# Altium PCB POWER_SUPPLY.PcbDoc (part 1 of 5)
Units mm, origin at the board's own origin, x right, y up, seen from the top; angles counter-clockwise.
Board outline 115 x 115 mm, 2 copper layers (Top Layer, Bottom Layer), stack 1.58 mm thick; 91 components, 48 nets, 207 pads, 26 vias.
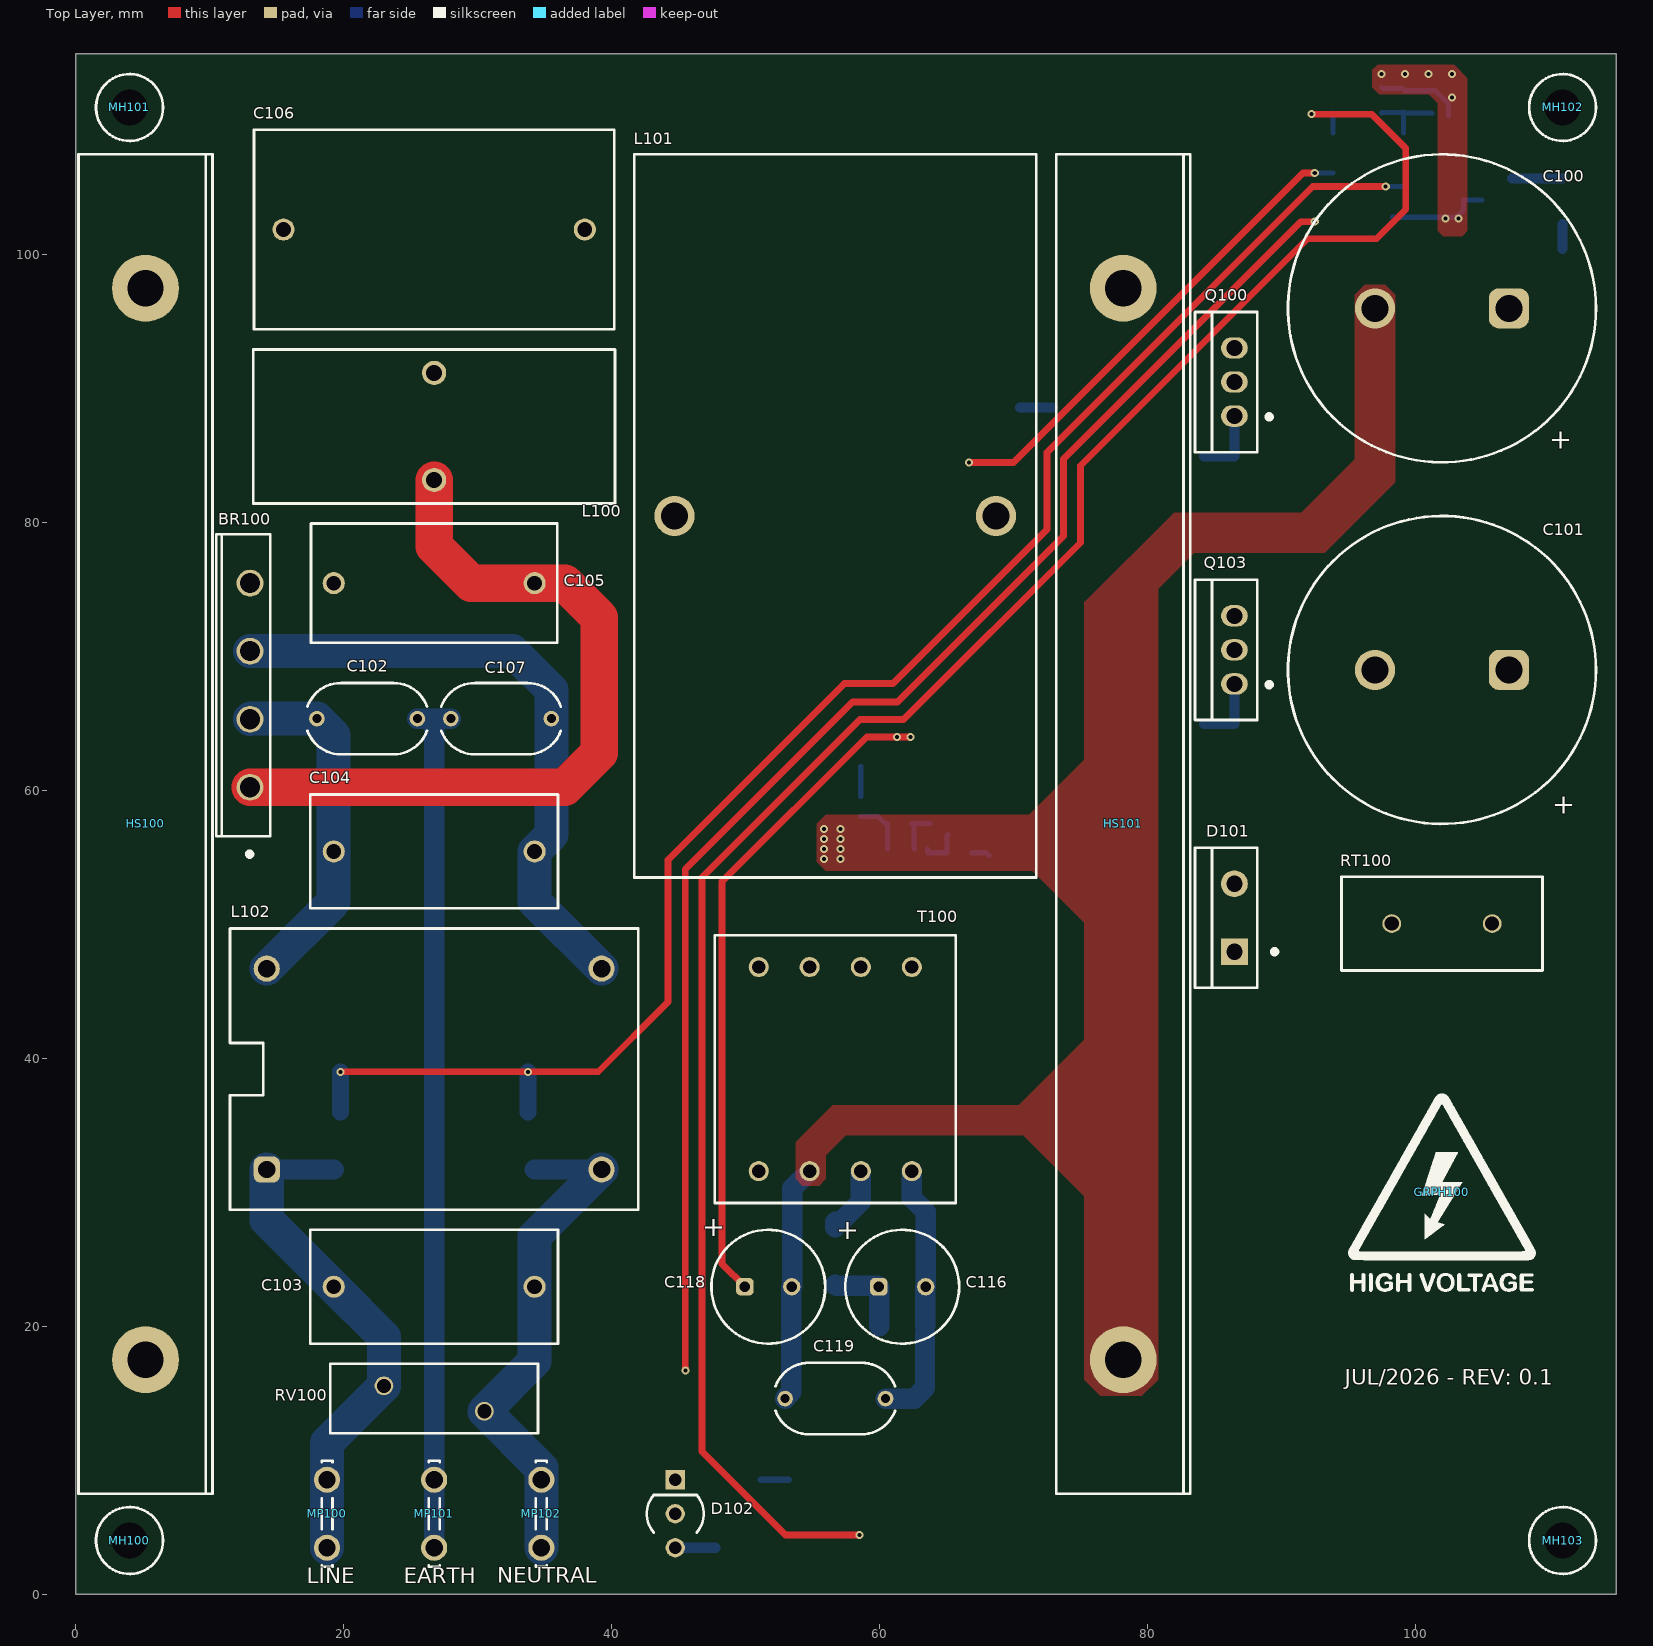
[diagram p0: Top Layer view]
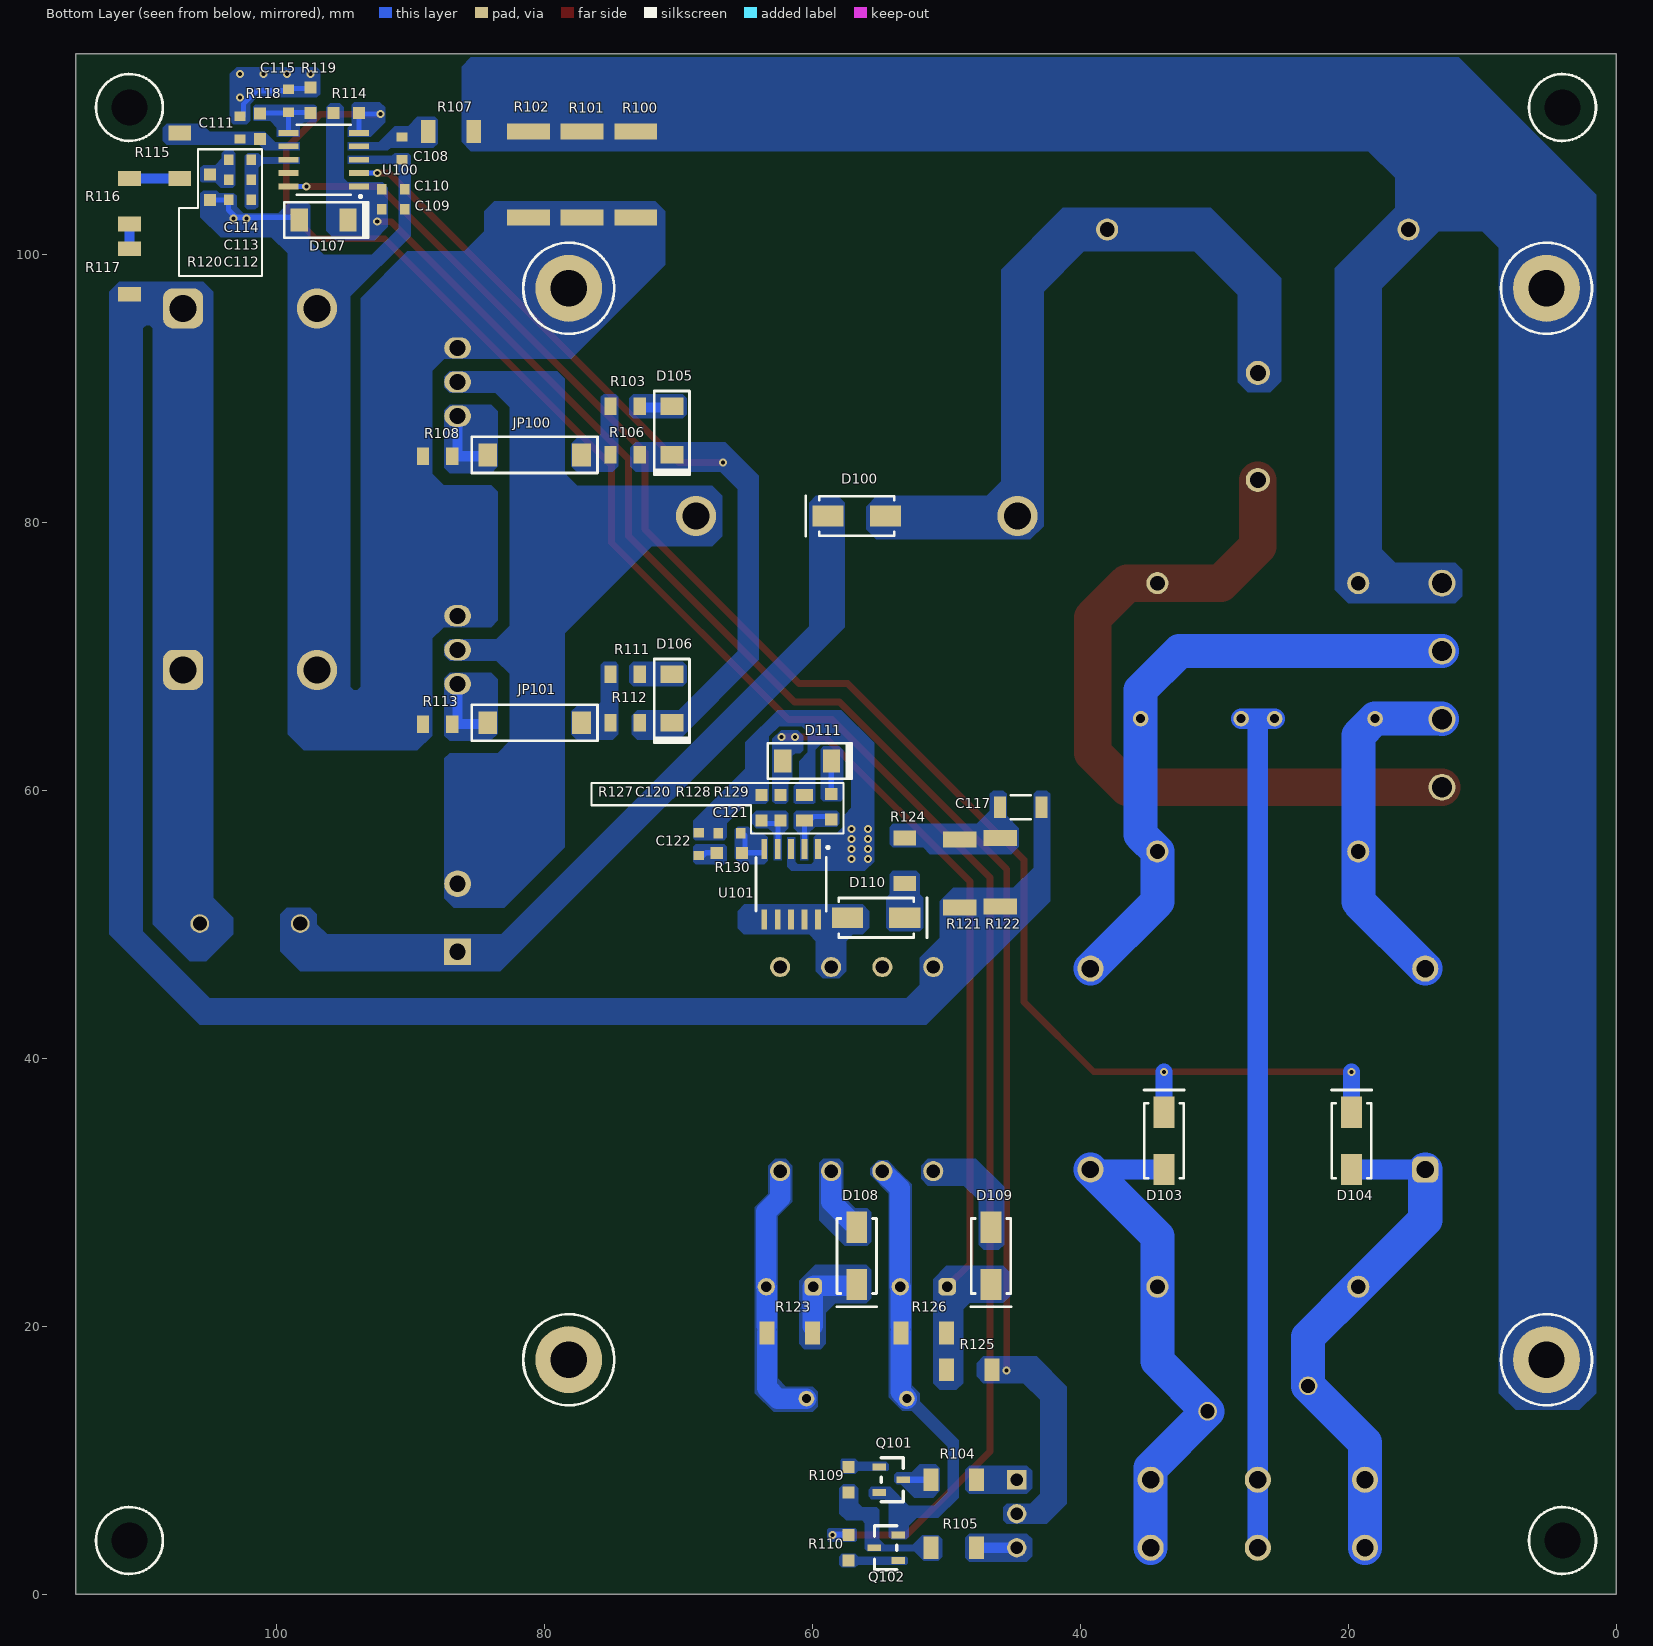
[diagram p1: Bottom Layer view, seen from below]
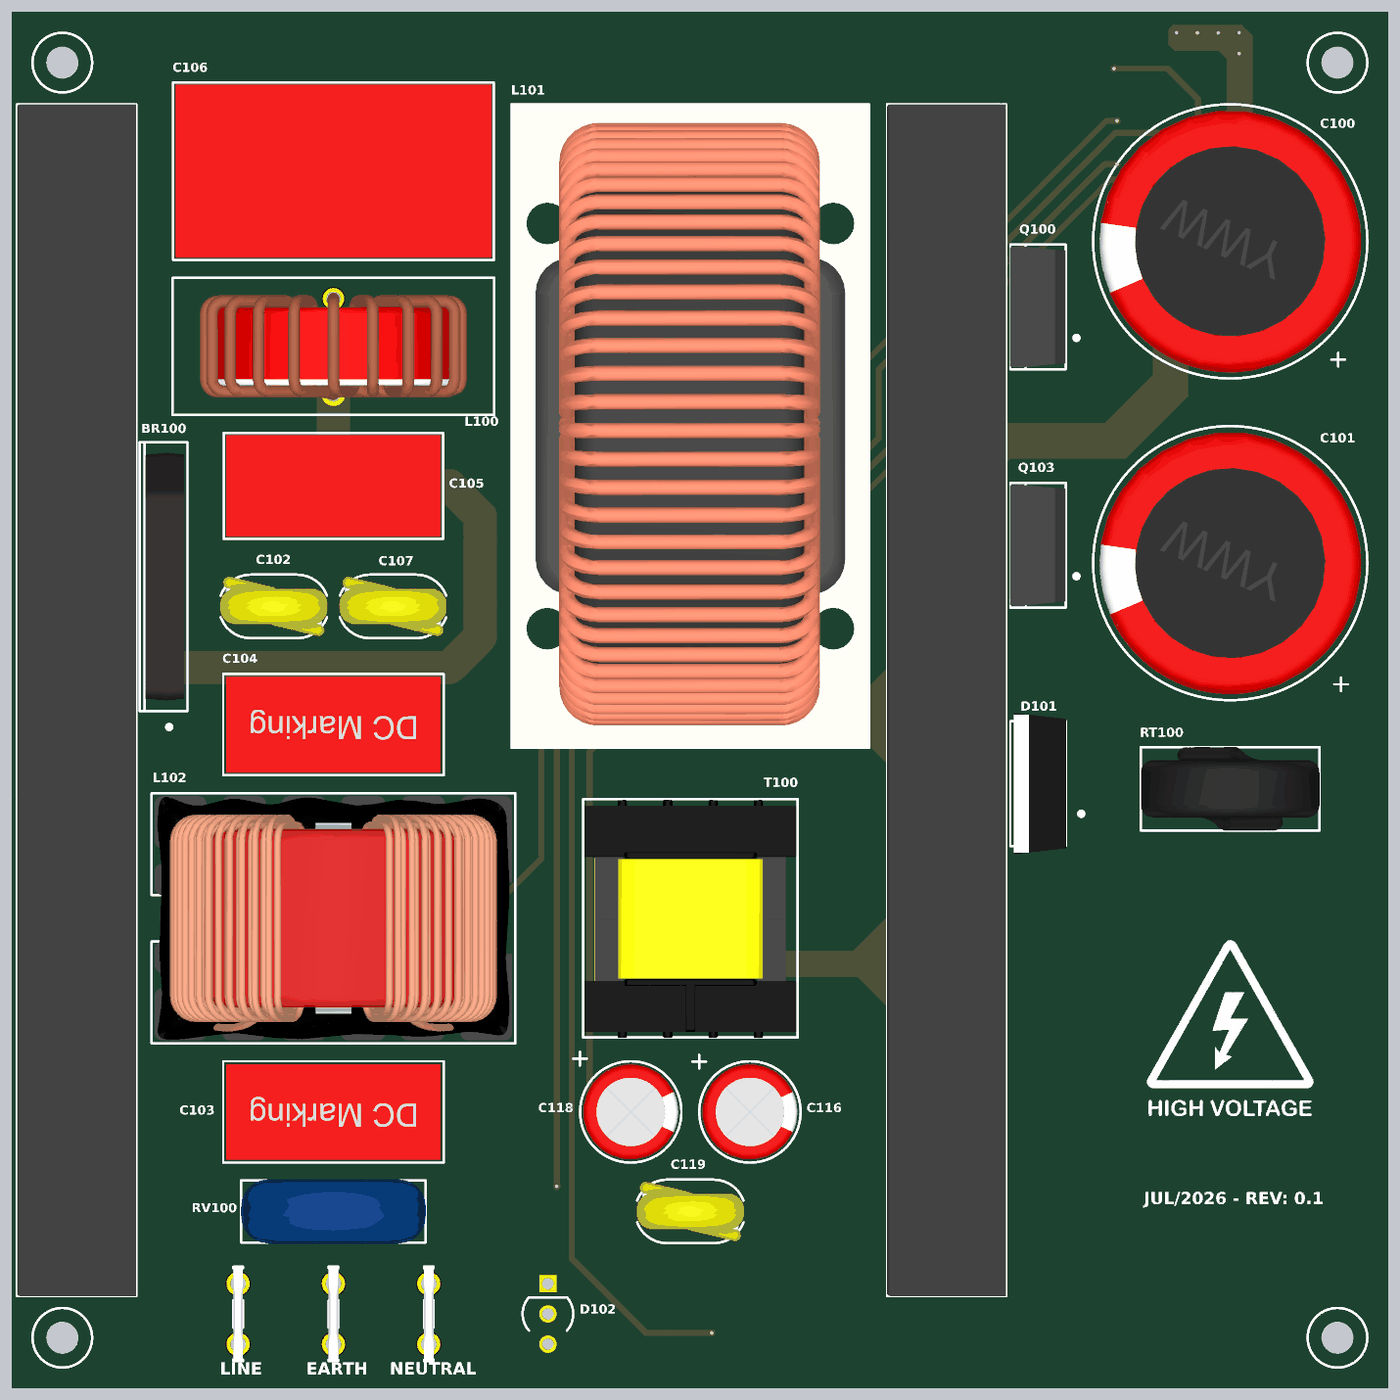
[diagram p3: 3D render of the assembled board from above, using the file's embedded part models]
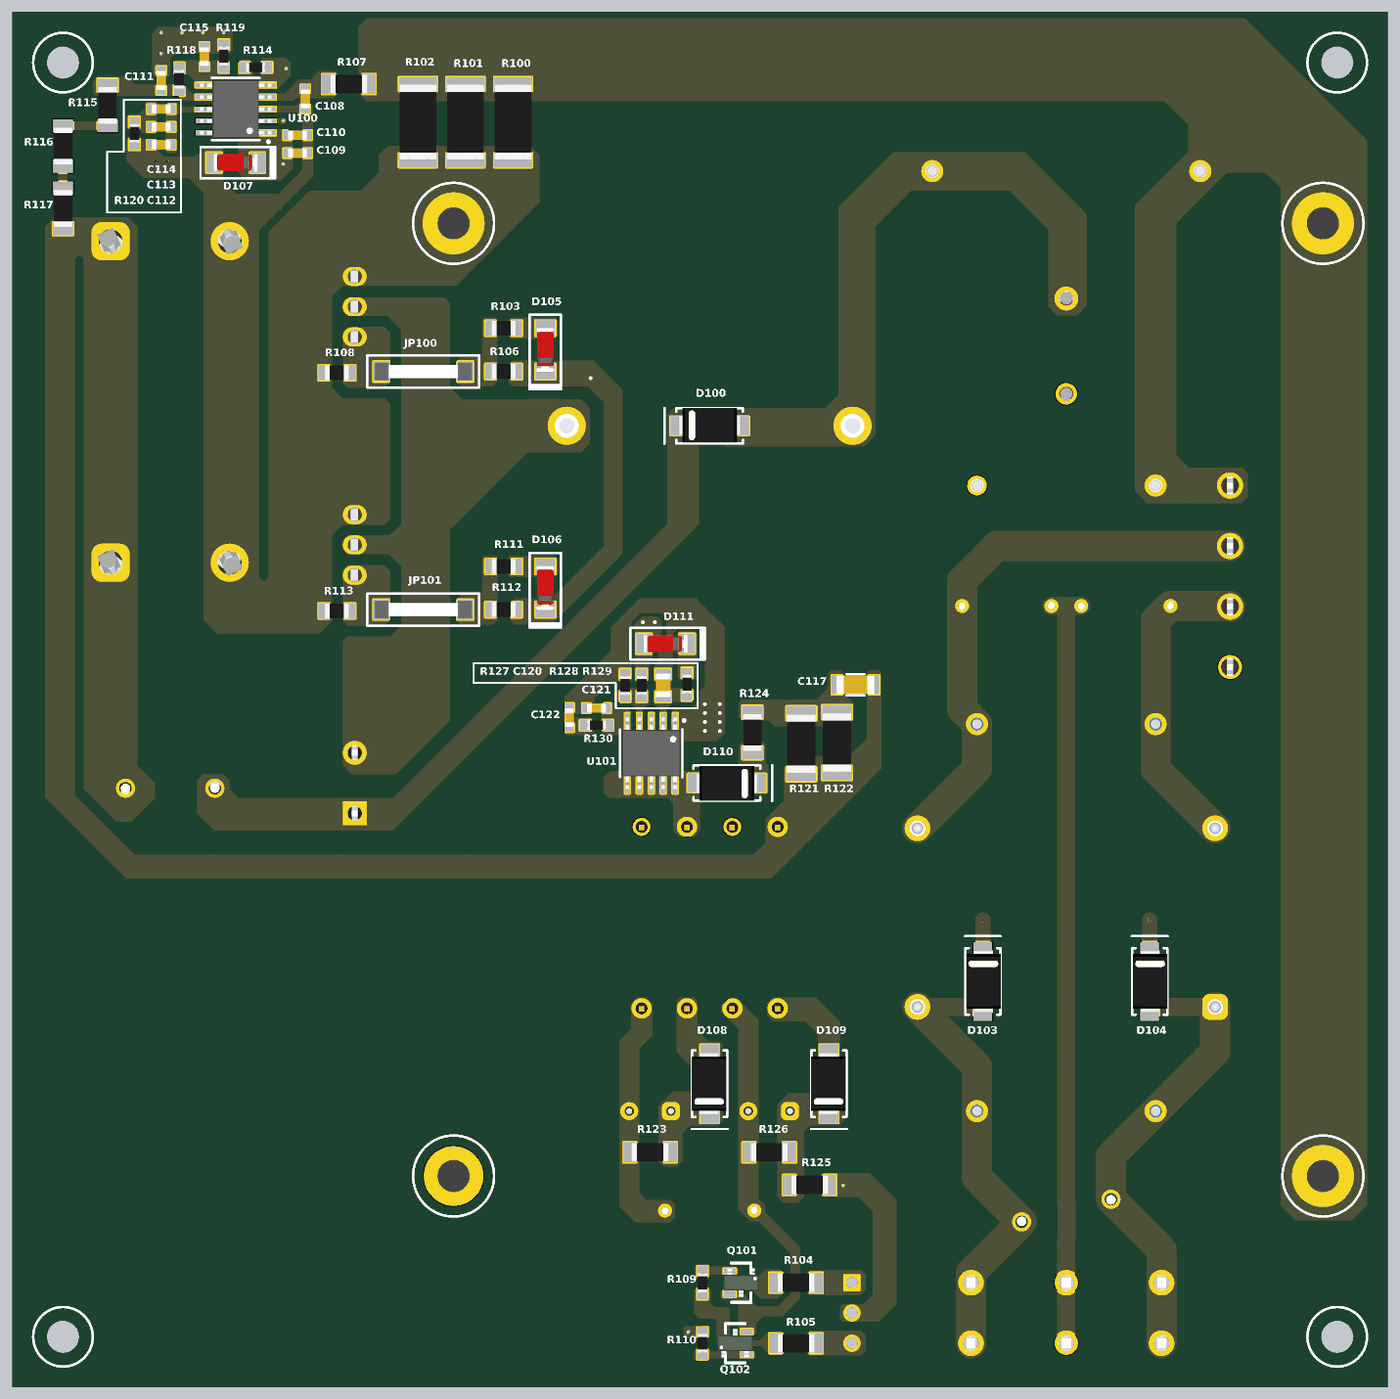
[diagram p4: 3D render of the assembled board from below, using the file's embedded part models]

## Layer stack, top to bottom
Top Solder: solder mask 0.01, Solder Resist, Dk 3.5
Top Layer: signal copper 0.07
Dielectric 1: dielectric 1.44, FR-4, Dk 4.8
Bottom Layer: signal copper 0.07
Bottom Solder: solder mask 0.01, Solder Resist, Dk 3.5

## Board outline
0,0 115,0 115,115 0,115

## Design rules (kind name [scope] priority, off if disabled: settings)
Clearance [All] p1: gap=0.254 ignorepadtopadclearanceinfootprint=FALSE
Height [All] p1: minheight=0 maxheight=65 prefheight=60
HoleSize [All] p1: absolutevalues=TRUE maxlimit=6.3 minlimit=0.15 maxpercent=80.000 minpercent=20.000
PolygonConnect [All] p1: connectstyle=Direct reliefconductorwidth=0.254 reliefentries=4 polygonreliefangle="90 Angle" airgapwidth=0.254
RoutingVias [All] p1: holewidth=0.3 width=0.6 viastyle="Through Hole" minholewidth=0.3 minwidth=0.6 maxholewidth=0.3 maxwidth=0.6
SilkToSolderMaskClearance [IsPad] p1: minsilkscreentomaskgap=0.15 clearancetoexposedcopper=TRUE
SolderMaskExpansion [All] p1: expansion=0.1 istentingtop=FALSE
SupplyNets "Schematic Supply Nets_5" [InNet('+5V_ISO')] p1: voltage=0.000
SupplyNets "Schematic Supply Nets_4" [InNet('+400V_PFC')] p2: voltage=0.000
SupplyNets "Schematic Supply Nets_3" [InNet('GND_ISO')] p3: voltage=0.000
SupplyNets "Schematic Supply Nets_2" [InNet('GND_PFC')] p4: voltage=0.000
SupplyNets "Schematic Supply Nets_1" [InNet('+15V')] p5: voltage=0.000
SupplyNets "Schematic Supply Nets" [InNet('EARTH')] p6: voltage=0.000
Width [All] p1: maxlimit=5.08 minlimit=0.254 preferedwidth=1.016
27 further rules are at their usual default settings.

## Classes and differential pairs
component class 2_FLYBACK_AUXILIAR: C116 C117 C118 C119 C120 C121 C122 D108 D109 D110 D111 MH100 MH101 MH102 MH103 R121 R122 R123 R124 R125 R126 R127 R128 R129 R130 T100 U101
component class 1_PFC: BR100 C100 C101 C102 C103 C104 C105 C106 C107 C108 C109 C110 C111 C112 C113 C114 C115 D100 D101 D102 D103 D104 D105 D106 D107 F1 GRPH100 HS100 HS101 JP100 JP101 L100 L101 L102 MP100 MP101 MP102 Q100 Q101 Q102 Q103 R100 R101 R102 R103 R104 R105 R106 R107 R108 R109 R110 R111 R112 R113 R114 R115 R116 R117 R118 R119 R120 RT100 RV100 U100

## Components (designator, comment, footprint, x,y, rotation, side; value= is the part's Value field where it differs from the comment)
BR100 "GBU6J" GBU 13,67.864 r90 top value=400pF
C100 "150µF, 450V" WCAP-AIG8_D22H50 102,96 r0 top
C101 "150µF, 450V" WCAP-AIG8_D22H50 102,69 r0 top
C102 "2.2nF, 440VAC" CAP_5US63V7_VIS 21.75,65.367 r180 top value=2.2nF
C103 "470nF, 310VAC" WCAP-FTXX_L18W8H14 26.75,22.95 r180 top
C104 "470nF, 310VAC" WCAP-FTXX_L18W8H14 26.75,55.45 r180 top
C105 "220nF, 630VDC" WCAP-FTXH_L18W8.5H14.5 26.75,75.484 r0 top
C106 "1.5µF, 630VDC" WCAP-FTXH_L26.5W14.5H24.5 26.75,101.884 r0 top
C107 "2.2nF, 440VAC" CAP_5US63V7_VIS 31.75,65.367 r180 top value=2.2nF
C108 "100pF, 25V" WCAP-CSGP_0603_L1.6W0.8H0.8_Wave 90.65,107.95 r90 bottom
C109 "1μF, 50V" WCAP-CSGP_0603_L1.6W0.8H0.8_Wave 91.3,103.4 r0 bottom
C110 "100nF, 50V" WCAP-CSGP_0603_L1.6W0.8H0.8_Wave 91.3,104.9 r0 bottom
C111 "3.3nF, 25V" WCAP-CSGP_0603_L1.6W0.8H0.8_Wave 102.75,109.5 r270 bottom
C112 "150pF, 25V" WCAP-CSGP_0603_L1.6W0.8H0.8_Wave 102.75,104.1 r180 bottom
C113 "NM" WCAP-CSGP_0603_L1.6W0.8H0.8_Wave 102.75,105.6 r180 bottom
C114 "2.2nF, 25V" WCAP-CSGP_0603_L1.6W0.8H0.8_Wave 102.75,107.1 r180 bottom
C115 "10pF, 25V" WCAP-CSGP_0603_L1.6W0.8H0.8_Wave 99.125,111.5 r270 bottom
C116 "220µF, 16V" WCAP-ATUL_D8H11.5 61.7,22.95 r180 top locked
C117 "2.2nF, 630V" WCAP-CSMH_1206_H1.6 44.45,58.75 r180 bottom
C118 "150uF, 25V" WCAP-ATLI_D8H11.5 51.7,22.95 r180 top locked
C119 "2.2nF, 440VAC" CAP_5US63V7_VIS 56.7,14.6 r0 top locked value=2.2nF
C120 "4.7μF, 25V" WCAP-CSGP_0805_L2W1.25H1.25 60.6,58.7 r270 bottom
C121 "470pF, 25V" WCAP-CSGP_0603_L1.6W0.8H0.8_Wave 66.2,56.8 r180 bottom
C122 "33nF, 25V" WCAP-CSGP_0603_L1.6W0.8H0.8_Wave 68.5,56 r270 bottom
D100 "STTH2L06A" SMA 56.7,80.5 r180 bottom
D101 "STTH806DTI" TO-220AC 86.5,50.5 r90 top
D102 "BICOLOR RED/GREEN" LED_3MM_GREEN_RED 44.75,6 r270 top locked
D103 "S1M" SMA 33.75,33.84 r270 bottom value=6.6pF
D104 "S1M" SMA 19.75,33.84 r270 bottom value=6.6pF
D105 "LL4148" SOD-80-DIODE 70.5,86.876 r90 bottom
D106 "LL4148" SOD-80-DIODE 70.5,66.876 r90 bottom
D107 "18V, 0.5W" SOD-80-DIODE 96.5,102.6 r0 bottom
D108 "STPS1L40A" SMA 56.7,25.25 r90 bottom
D109 "STPS1150A" SMA 46.675,25.25 r90 bottom
D110 "STTH1L06A" SMA 55.25,50.5 r0 bottom
D111 "LL4148" SOD-80-DIODE 60.4,62.2 r0 bottom
GRPH100 "DANGER HIGH VOLTAGE ICON" DANGER_HIGH_VOLTAGE 102,30 r0 top
HS100 "100x60x10mm" HEATSINK_100MM_60MM_10MM 5.2,57.5 r0 top
HS101 "100x60x10mm" HEATSINK_100MM_60MM_10MM 78.2,57.5 r0 top
JP100 "JUMPER" JUMPER_TX_8P2MM 80.75,85.06 r0 bottom
JP101 "JUMPER" JUMPER_TX_8P2MM 80.75,65.06 r0 bottom
L100 "SHORTED" 7447070 26.75,87.184 r180 top
L101 "570µH, 8.7A" IND-TOR-MMTR014901_NO_MH 56.7,80.5 r90 top value=570µH
L102 "3.3mH" "WE-CMB_Type XL_L30W21H35" 26.75,39.2 r0 top
MH100 "Mounting Hole 2.5mm" MOUNTING_HOLE_M2P5_UNPLATED 4,4 r0 top
MH101 "Mounting Hole 2.5mm" MOUNTING_HOLE_M2P5_UNPLATED 4,111 r0 top locked
MH102 "Mounting Hole 2.5mm" MOUNTING_HOLE_M2P5_UNPLATED 111,111 r0 top
MH103 "Mounting Hole 2.5mm" MOUNTING_HOLE_M2P5_UNPLATED 111,4 r0 top locked
MP100 "7471287" 7471287 18.75,6 r270 top
MP101 "7471287" 7471287 26.75,6 r270 top
MP102 "7471287" 7471287 34.75,6 r270 top
Q100 "STF24N60M2" TO-220FP 86.5,90.5 r90 top
Q101 "SBC817-40LT3G" SOT-23-3 54.05,8.54 r270 bottom
Q102 "SBC817-40LT3G" SOT-23-3 54.55,3.46 r90 bottom
Q103 "STF24N60M2" TO-220FP 86.5,70.5 r90 top
R100 "0.18Ω, 1W" 2512-WAVE 73.2,106 r270 bottom value=180mΩ
R101 "0.18Ω, 1W" 2512-WAVE 77.2,106 r270 bottom value=180mΩ
R102 "0.18Ω, 1W" 2512-WAVE 81.2,106 r270 bottom value=180mΩ
R103 "3.92Ω" 0805-WAVE 74,88.692 r0 bottom
R104 "1.33kΩ" 1206-WAVE 49.45,8.54 r180 bottom
R105 "1.33kΩ" 1206-WAVE 49.45,3.46 r180 bottom
R106 "15Ω" 0805-WAVE 74,85.06 r0 bottom
R107 "59Ω" 1206-WAVE 87,109.2 r180 bottom
R108 "10kΩ" 0805-WAVE 88,84.96 r180 bottom
R109 "17.8kΩ" 0603-WAVE 57.3,8.54 r270 bottom
R110 "17.8kΩ" 0603-WAVE 57.3,3.46 r90 bottom
R111 "3.92Ω" 0805-WAVE 74,68.692 r0 bottom
R112 "15Ω" 0805-WAVE 74,65.06 r0 bottom
R113 "10kΩ" 0805-WAVE 88,64.96 r180 bottom
R114 "332kΩ" 0603-WAVE 94.825,110.6 r0 bottom
R115 "2.21MΩ" 1206-WAVE 107.25,107.4 r90 bottom
R116 "2.21MΩ" 1206-WAVE 111,104 r90 bottom
R117 "2.21MΩ" 1206-WAVE 111,98.75 r90 bottom
R118 "15.4kΩ" 0603-WAVE 101.25,109.6 r270 bottom
R119 "26.1kΩ" 0603-WAVE 97.5,111.55 r270 bottom
R120 "56.2kΩ" 0603-WAVE 105,105.05 r90 bottom
R121 "150kΩ" 2010-WAVE 49,53.8 r270 bottom
R122 "NM" 2010-WAVE 46,53.9 r270 bottom
R123 "511Ω" 1206-WAVE 61.7,19.5 r180 bottom
R124 "47Ω" 1206-WAVE 53.11,54.75 r90 bottom
R125 "0Ω" 1206-WAVE 48.3,16.75 r180 bottom
R126 "1.5kΩ" 1206-WAVE 51.7,19.5 r180 bottom
R127 "10Ω" 0603-WAVE 58.6,58.8 r90 bottom
R128 "301kΩ" 0603-WAVE 62.4,58.7 r90 bottom
R129 "26.1kΩ" 0603-WAVE 63.8,58.7 r270 bottom
R130 "56.2kΩ" 0603-WAVE 66.2,55.35 r180 bottom
RT100 "1Ω, 9A" B57237S0109M054 102,50.066 r0 top value=1Ω
RV100 "300VAC" MOV-B72214S0301K101 26.75,14.6 r0 top value=400pF
T100 "TRANSFORMADOR CUSTOMIZADO" TDK_E_16_8_5 56.7,39.2 r270 top
U100 "L4986A" SSOP-10 96.5,107.1 r0 bottom
U101 "VIPER222LSTR" SSOP-10 61.6,53 r270 bottom

## Footprints (in the part's own frame and the unit in brackets; to place one, negate y for a bottom-side part, rotate by r counter-clockwise, add the part's x,y. Pads: shape width x height; smd on the part's side, far side on the other; paste and mask are expansions set on the pad)
0603-WAVE [mm]
  rect 0.9x0.9 smd: 1(-0.95,0) 2(0.95,0)
  body extent -0.8,-0.4 0.8,0.4, height 0.45
0805-WAVE [mm]
  rect 0.9x1.3 smd: 1(-1.1,0) 2(1.1,0)
  body extent -1,-0.63 1,0.62, height 0.5
1206-WAVE [mm]
  rect 1.1x1.7 smd: 1(-1.7,0) 2(1.7,0)
  body extent -1.55,-0.77 1.55,0.78, height 0.55
2010-WAVE [mm]
  rect 1.2x2.5 smd: 1(-2.55,0) 2(2.55,0)
  body extent -2.45,-1.2 2.45,1.2, height 0.55
2512-WAVE [mm]
  rect 1.2x3.2 smd: 1(-3.2,0) 2(3.2,0)
  body extent -3.15,-1.55 3.15,1.55, height 0.55
7447070 [mm] "Leaded Toroidal Line Choke, 2-leads, body 25x11.5mm"
  round 1.8 hole 1.2: 1(0,4) 2(0,-4)
  silkscreen extent -13.5,-5.75 13.5,5.75, body extent -11.21,-4.5 11.21,4.5, height 22.01
7471287 [mm] "Mounting Tabs & Tubular Cable Lugs"
  round 1.95 hole 1.3: 1(-2.54,0) 1(2.54,0)
  silkscreen extent -3.96,-0.41 3.96,0.41, body extent -3.96,-0.4 3.96,0.41, height 10.27
B57237S0109M054 [mm]
  round 1.4 hole 1.05: 1(-3.75,0) 2(3.75,0)
  silkscreen extent -7.5,-3.5 7.5,3.5, body extent -7.5,-3.5 7.5,3.5, height 22
CAP_5US63V7_VIS [mil]
  round 46 hole 26 paste-99999 mask+0: 1(-147.64,0) 2(147.64,0)
  silkscreen extent -176,-105 176,105, body extent -177,-98 177,98, height 472
DANGER_HIGH_VOLTAGE [mm]
  silkscreen extent -6.99,-7.41 6.99,7.36
GBU [mm]
  round 2 hole 1.5 paste-2539.97 mask+0.1: 1(-7.62,0) 2(-2.54,0) 3(2.54,0) 4(7.62,0)
  silkscreen extent -12.71,-1.5 11.28,2.52, body extent -10.4,-1.25 10.4,2.05, height 29.52
HEATSINK_100MM_60MM_10MM [mm]
  round 5 hole 2.7: H1(0,40) H2(0,-40)
  silkscreen extent -5,-50 5,50, body extent -5,-50 5,50, height 60
IND-TOR-MMTR014901_NO_MH [mm]
  round 3 hole 2: 1(0,12) 2(0,-12)
  silkscreen extent -27,-15 27,15, body extent -27,-15 27,15, height 52.18
JUMPER_TX_8P2MM [mm]
  rect 1.4x1.7 smd mask+0.1: 1(-3.5,0) 2(3.5,0)
  silkscreen extent -4.7,-1.35 4.7,1.35, body extent -4.1,-0.75 4.1,0.75, height 0.6
LED_3MM_GREEN_RED [mm]
  rect 1.45x1.45 hole 0.95 paste-2539.97 mask+0: 1(-2.54,0)
  round 1.45 hole 0.95 paste-2539.97 mask+0: 2(0,0) 3(2.54,0)
  silkscreen extent -1.4,-2.12 1.4,2.12, body extent -2.79,-2 2.79,2, height 6.53
MOUNTING_HOLE_M2P5_UNPLATED [mm]
  round 2.5 hole 2.7 unplated: H(0,0)
  silkscreen extent -2.5,-2.5 2.5,2.5
MOV-B72214S0301K101 [mm]
  round 1.4 hole 1.05: 1(-3.75,0.95) 2(3.75,-0.95)
  silkscreen extent -7.75,-2.6 7.75,2.6, body extent -7.75,-2.7 7.75,2.7, height 20.73
SMA [mm]
  rect 2.33x1.56 smd paste+0 mask+0.1: 1(-2.14,0)
  rect 2.33x1.56 smd paste+0 mask+0.102: 2(2.14,0)
  silkscreen extent -3.8,-1.5 2.8,1.5, body extent -2.64,-1.42 2.64,1.5, height 2.41
SOD-80-DIODE [mil]
  rect 51x67 smd paste+0 mask+3.94: 1(-71.5,0) 2(71.5,0)
  silkscreen extent -130,-52 116,52, body extent -73,-31 73,31, height 62
SOT-23-3 [mil]
  rect 20x40 smd mask+3.94: 1(-37.4,-38) 2(37.4,-38) 3(0,32.75)
  silkscreen extent -65,-33 65,33, body extent -57,-47 57,47, height 44
SSOP-10 [mm]
  rect 1.5x0.432 smd: 1(-2.625,2) 2(-2.625,1) 3(-2.625,0) 4(-2.625,-1) 5(-2.625,-2) 6(2.625,-2) 7(2.625,-1) 8(2.625,0) 9(2.625,1) 10(2.625,2)
  silkscreen extent -2.85,-2.61 2,2.85, body extent -3,-2.45 3,2.45, height 1.55
TDK_E_16_8_5 [mm]
  round 1.5 hole 1: 1(-7.62,5.715) 2(-7.62,1.905) 3(-7.62,-1.913) 4(-7.62,-5.715) 5(7.62,-5.715) 6(7.62,-1.913) 7(7.62,1.905) 8(7.62,5.715)
  silkscreen extent -10,-9 10,9, body extent -9.95,-8.9 10.05,8.9, height 14.11
TO-220AC [mm]
  rect 2x2 hole 1.2 paste-2539.97 mask+0: 1(-2.538,0)
  round 2 hole 1.2 paste-2539.97 mask+0: 2(2.538,0)
  silkscreen extent -5.23,-3.1 5.23,2.95, body extent -5.94,-1.75 5.94,2.65, height 22.51
TO-220FP [mm]
  oval 1.6x2 hole 1.2 paste-2539.97 mask+0: 1(-2.54,0) 2(0,0) 3(2.54,0)
  silkscreen extent -5.23,-2.7 5.23,2.95, body extent -5.08,-1.69 5.08,3.01, height 22.29
WCAP-AIG8_D22H50 [mm] "Aluminium Electrolytic Snap-In Capacitors, 22x50mm"
  rrect50% 3x3 hole 2: 1(5,0)
  round 3 hole 2: 2(-5,0)
  silkscreen extent -11.5,-11.5 11.5,11.5, body extent -15.55,-15.55 15.54,15.54, height 50.19
WCAP-ATLI_D8H11.5 [mm] "Aluminum Electrolytic Capacitors, 8x11.5mm"
  rrect50% 1.3x1.3 hole 0.8: 1(1.75,0)
  round 1.3 hole 0.8: 2(-1.75,0)
  silkscreen extent -4.25,-4.25 4.25,4.25, body extent -3.99,-4 4,4, height 11.81
WCAP-ATUL_D8H11.5 [mm] "Aluminum Electrolytic Capacitors, 8x11.5mm"
  rrect50% 1.3x1.3 hole 0.8: 1(1.75,0)
  round 1.3 hole 0.8: 2(-1.75,0)
  silkscreen extent -4.25,-4.25 4.25,4.25, body extent -3.99,-4 4,4, height 11.81
WCAP-CSGP_0603_L1.6W0.8H0.8_Wave [mm] "Ceramic Capacitors, 0603, body 1.6x0.8mm"
  rect 0.7x0.8 smd: 1(-0.85,0) 2(0.85,0)
  body extent -0.8,-0.4 0.8,0.4, height 0.8
WCAP-CSGP_0805_L2W1.25H1.25 [mm] "Ceramic Capacitors, body 2x1.25mm"
  rect 0.9x1.3 smd: 1(-0.95,0) 2(0.95,0)
  body extent -1,-0.63 1,0.63, height 1.25
WCAP-CSMH_1206_H1.6 [mm] "Ceramic Capacitors, body 3.2x1.6mm"
  rect 0.9x1.6 smd: 1(-1.55,0) 2(1.55,0)
  silkscreen extent -0.75,-0.9 0.75,0.9, body extent -1.6,-0.8 1.6,0.8, height 1.6
WCAP-FTXH_L18W8.5H14.5 [mm] "Film Capacitor, body 18.00x8.50mm"
  round 1.65 hole 1.1: 1(-7.5,0) 2(7.5,0)
  silkscreen extent -9.2,-4.45 9.2,4.45, body extent -9,-4.25 9,4.25, height 14.5
WCAP-FTXH_L26.5W14.5H24.5 [mm] "Film Capacitor, body 26.50x14.50mm"
  round 1.65 hole 1.1: 1(-11.25,0) 2(11.25,0)
  silkscreen extent -13.45,-7.45 13.45,7.45, body extent -13.25,-7.25 13.25,7.25, height 24.35
WCAP-FTXX_L18W8H14 [mm] "Film Capacitors, 18x8x14mm"
  round 1.65 hole 1.1: 1(-7.5,0) 2(7.5,0)
  silkscreen extent -9.25,-4.25 9.25,4.25, body extent -9,-4 9,4, height 14.05
"WE-CMB_Type XL_L30W21H35" [mm] "Common Mode Power Line Choke, 4-Leads, body 30x21mm"
  rrect50% 1.95x1.95 hole 1.3: 1(-12.5,-7.5)
  round 1.95 hole 1.3: 2(12.5,-7.5) 3(12.5,7.5) 4(-12.5,7.5)
  silkscreen extent -15.25,-10.5 15.25,10.5, body extent -15,-10.25 15,10.25, height 34.19

## Part data
BR100: "BRIDGE RECT 1PHASE 600V 6A GBU", Average Rectified Current=6A, Case/Package=SIP, Forward Voltage=1V, Manufacturer=onsemi, Manufacturer Lifecycle Status=ACTIVE, Max Forward Surge Current (Ifsm)=175A, Max Junction Temperature (Tj)=150°C, Max Power Dissipation=12W, Max Repetitive Reverse Voltage (Vrrm)=600V, Max Reverse Leakage Current=5µA, Min Operating Temperature=-55°C, Supplier Part Number=GBU6JFS-ND, Category="Bridge Rectifier Diodes", China RoHS=Non-Compliant, ComponentLink1Description=https://datasheet.octopart.com:443/GBU6J-onsemi-datasheet-166784474.pdf?src-supplier=Upverter, ComponentLink1URL=https://datasheet.octopart.com:443/GBU6J-onsemi-datasheet-166784474.pdf?src-supplier=Upverter, ComponentLink2Description=https://sigma.octopart.com:443/159494665/technical_drawing/onsemi-GBU6J.pdf?src-supplier=Upverter, ComponentLink2URL=https://sigma.octopart.com:443/159494665/technical_drawing/onsemi-GBU6J.pdf?src-supplier=Upverter, ComponentLink3Description=https://datasheet.octopart.com:443/GBU6J-ON-Semiconductor-datasheet-21133206.pdf?src-supplier=IHS, ComponentLink3URL=https://datasheet.octopart.com:443/GBU6J-ON-Semiconductor-datasheet-21133206.pdf?src-supplier=IHS, ComponentLink4Description=https://datasheet.octopart.com:443/GBU6J-onsemi-datasheet-180960912.pdf?src-supplier=IHS, ComponentLink4URL=https://datasheet.octopart.com:443/GBU6J-onsemi-datasheet-180960912.pdf?src-supplier=IHS, ComponentLink5Description=https://datasheet.octopart.com:443/GBU6J-ON-Semiconductor-datasheet-133511150.pdf?src-supplier=Master+Electronics, ComponentLink5URL=https://datasheet.octopart.com:443/GBU6J-ON-Semiconductor-datasheet-133511150.pdf?src-supplier=Master+Electronics, ComponentLink6Description=https://datasheet.octopart.com:443/GBU6J-ON-Semiconductor-datasheet-81100643.pdf?src-supplier=onsemi, ComponentLink6URL=https://datasheet.octopart.com:443/GBU6J-ON-Semiconductor-datasheet-81100643.pdf?src-supplier=onsemi, ComponentLink7Description=https://datasheet.octopart.com:443/GBU6J-ON-Semiconductor-datasheet-86697259.pdf?src-supplier=onsemi, ComponentLink7URL=https://datasheet.octopart.com:443/GBU6J-ON-Semiconductor-datasheet-86697259.pdf?src-supplier=onsemi, ComponentLink8Description=https://datasheet.octopart.com:443/GBU6J-Fairchild-datasheet-126805.pdf?src-supplier=Fairchild+Semiconductor, ComponentLink8URL=https://datasheet.octopart.com:443/GBU6J-Fairchild-datasheet-126805.pdf?src-supplier=Fairchild+Semiconductor, ComponentLink9Description=https://sigma.octopart.com:443/17352143/technical_drawing/Fairchild-Semiconductor-GBU6J.pdf?src-supplier=Fairchild+Semiconductor, ComponentLink9URL=https://sigma.octopart.com:443/17352143/technical_drawing/Fairchild-Semiconductor-GBU6J.pdf?src-supplier=Fairchild+Semiconductor, ComponentLink10Description=https://datasheet.octopart.com:443/GBU6J-Fairchild-Semiconductor-datasheet-12533422.pdf?src-supplier=Newark, ComponentLink10URL=https://datasheet.octopart.com:443/GBU6J-Fairchild-Semiconductor-datasheet-12533422.pdf?src-supplier=Newark, ComponentLink11Description=https://datasheet.octopart.com:443/GBU6J-onsemi-datasheet-181958985.pdf?src-supplier=Newark, ComponentLink11URL=https://datasheet.octopart.com:443/GBU6J-onsemi-datasheet-181958985.pdf?src-supplier=Newark, ComponentLink12Description=https://datasheet.octopart.com:443/GBU6J-Fairchild-datasheet-21080.pdf?src-supplier=Newark, ComponentLink12URL=https://datasheet.octopart.com:443/GBU6J-Fairchild-datasheet-21080.pdf?src-supplier=Newark, ComponentLink13Description=https://datasheet.octopart.com:443/GBU6J-Fairchild-Semiconductor-datasheet-67910529.pdf?src-supplier=Newark, ComponentLink13URL=https://datasheet.octopart.com:443/GBU6J-Fairchild-Semiconductor-datasheet-67910529.pdf?src-supplier=Newark, ComponentLink14Description=https://datasheet.octopart.com:443/GBU6J-ON-Semiconductor-datasheet-86690898.pdf?src-supplier=Farnell, ComponentLink14URL=https://datasheet.octopart.com:443/GBU6J-ON-Semiconductor-datasheet-86690898.pdf?src-supplier=Farnell, ComponentLink15Description=https://datasheet.octopart.com:443/GBU6J-Fairchild-Semiconductor-datasheet-17852642.pdf?src-supplier=Farnell, ComponentLink15URL=https://datasheet.octopart.com:443/GBU6J-Fairchild-Semiconductor-datasheet-17852642.pdf?src-supplier=Farnell, ComponentLink16Description=https://datasheet.octopart.com:443/GBU6J-Fairchild-Semiconductor-datasheet-16807792.pdf?src-supplier=Farnell, ComponentLink16URL=https://datasheet.octopart.com:443/GBU6J-Fairchild-Semiconductor-datasheet-16807792.pdf?src-supplier=Farnell, ComponentLink17Description=https://datasheet.octopart.com:443/GBU6J-onsemi-datasheet-165581311.pdf?src-supplier=TME, ComponentLink17URL=https://datasheet.octopart.com:443/GBU6J-onsemi-datasheet-165581311.pdf?src-supplier=TME, ComponentLink18Description=https://datasheet.octopart.com:443/GBU6J-ON-Semiconductor-datasheet-140794306.pdf?src-supplier=Future+Electronics, ComponentLink18URL=https://datasheet.octopart.com:443/GBU6J-ON-Semiconductor-datasheet-140794306.pdf?src-supplier=Future+Electronics, ComponentLink19Description=https://datasheet.octopart.com:443/GBU6J-Fairchild-Semiconductor-datasheet-14038890.pdf?src-supplier=iiiC, ComponentLink19URL=https://datasheet.octopart.com:443/GBU6J-Fairchild-Semiconductor-datasheet-14038890.pdf?src-supplier=iiiC, ComponentLink20Description=https://datasheet.octopart.com:443/GBU6J-Fairchild-Semiconductor-datasheet-68551039.pdf?src-supplier=element14+APAC, ComponentLink20URL=https://datasheet.octopart.com:443/GBU6J-Fairchild-Semiconductor-datasheet-68551039.pdf?src-supplier=element14+APAC, ComponentLink21Description=https://datasheet.octopart.com:443/GBU6J-Fairchild-Semiconductor-datasheet-68612053.pdf?src-supplier=element14+APAC, ComponentLink21URL=https://datasheet.octopart.com:443/GBU6J-Fairchild-Semiconductor-datasheet-68612053.pdf?src-supplier=element14+APAC, ComponentLink22Description=https://datasheet.octopart.com:443/GBU6J-Fairchild-Semiconductor-datasheet-78863373.pdf?src-supplier=element14+APAC, ComponentLink22URL=https://datasheet.octopart.com:443/GBU6J-Fairchild-Semiconductor-datasheet-78863373.pdf?src-supplier=element14+APAC, ComponentLink23Description=http://sigma.octopart.com:80/150611767/rohs_statement/ON-Semiconductor-GBU6J.pdf?src-supplier=Compliance+Statements, ComponentLink23URL=http://sigma.octopart.com:80/150611767/rohs_statement/ON-Semiconductor-GBU6J.pdf?src-supplier=Compliance+Statements, ComponentLink24Description=http://sigma.octopart.com:80/17352174/reach_statement/Fairchild-Semiconductor-GBU6J.pdf?src-supplier=Compliance+Statements, ComponentLink24URL=http://sigma.octopart.com:80/17352174/reach_statement/Fairchild-Semiconductor-GBU6J.pdf?src-supplier=Compliance+Statements, ComponentLink25Description=http://sigma.octopart.com:80/17352175/materials_sheet/Fairchild-Semiconductor-GBU6J.pdf?src-supplier=Compliance+Statements, ComponentLink25URL=http://sigma.octopart.com:80/17352175/materials_sheet/Fairchild-Semiconductor-GBU6J.pdf?src-supplier=Compliance+Statements, ComponentLink26Description=http://sigma.octopart.com:80/33179563/reach_statement/Fairchild-Semiconductor-GBU6J.pdf?src-supplier=Compliance+Statements, ComponentLink26URL=http://sigma.octopart.com:80/33179563/reach_statement/Fairchild-Semiconductor-GBU6J.pdf?src-supplier=Compliance+Statements, ComponentLink27Description=http://sigma.octopart.com:80/33179564/materials_sheet/Fairchild-Semiconductor-GBU6J.pdf?src-supplier=Compliance+Statements, ComponentLink27URL=http://sigma.octopart.com:80/33179564/materials_sheet/Fairchild-Semiconductor-GBU6J.pdf?src-supplier=Compliance+Statements, ComponentLink28Description=http://sigma.octopart.com:80/reach_statement/ON-Semiconductor-company-79.pdf?src-supplier=Compliance+Statements, ComponentLink28URL=http://sigma.octopart.com:80/reach_statement/ON-Semiconductor-company-79.pdf?src-supplier=Compliance+Statements, ComponentLink29Description=http://sigma.octopart.com:80/rohs_statement/Fairchild-Semiconductor-company-11.pdf?src-supplier=Compliance+Statements, ComponentLink29URL=http://sigma.octopart.com:80/rohs_statement/Fairchild-Semiconductor-company-11.pdf?src-supplier=Compliance+Statements, ComponentLink30Description=http://sigma.octopart.com:80/rohs_statement/Fairchild-Semiconductor-company-10.pdf?src-supplier=Compliance+Statements, ComponentLink30URL=http://sigma.octopart.com:80/rohs_statement/Fairchild-Semiconductor-company-10.pdf?src-supplier=Compliance+Statements, ComponentLink31Description=http://sigma.octopart.com:80/reach_statement/Fairchild-Semiconductor-company-9.pdf?src-supplier=Compliance+Statements, ComponentLink31URL=http://sigma.octopart.com:80/reach_statement/Fairchild-Semiconductor-company-9.pdf?src-supplier=Compliance+Statements, ComponentLink32Description=https://octopart.com:443/opatz8j6/c1?t=Y2wIxELd3Wvq9IWEVKKTsbdrjJ7Ggdcm4i7JSptPPw2OaGcdNAyHNaP5bgDn4HJSA5mnN8_a5kzX1s712JK3R8stqVIhLyJyItma3TYm28DTKvbjFTnp9bYk8A4AIXKJFpEh79XU9GUBxzcHZjptp9FPQWLpaKOSykZ5o1DVQXF0q0gaE6lgzVboydEWVrcN4tBadYht0FIpjxhPRkvcWqPgXENNVtgZuGQUgEPqcjuw72yI6g81z1w_15eUU2XXELnp3BdylIv2_9Km_Qs0osbZzRO3K02k_zQ3u8EGf4sSmYaHqZ_JhNL-pzDAUAmjd_hCwscb2tsZsK7vxo9hC2CTL1CcZYwx3w&src-supplier=Compliance+Statements, ComponentLink32URL=https://octopart.com:443/opatz8j6/c1?t=Y2wIxELd3Wvq9IWEVKKTsbdrjJ7Ggdcm4i7JSptPPw2OaGcdNAyHNaP5bgDn4HJSA5mnN8_a5kzX1s712JK3R8stqVIhLyJyItma3TYm28DTKvbjFTnp9bYk8A4AIXKJFpEh79XU9GUBxzcHZjptp9FPQWLpaKOSykZ5o1DVQXF0q0gaE6lgzVboydEWVrcN4tBadYht0FIpjxhPRkvcWqPgXENNVtgZuGQUgEPqcjuw72yI6g81z1w_15eUU2XXELnp3BdylIv2_9Km_Qs0osbZzRO3K02k_zQ3u8EGf4sSmYaHqZ_JhNL-pzDAUAmjd_hCwscb2tsZsK7vxo9hC2CTL1CcZYwx3w&src-supplier=Compliance+Statements, ComponentLink33Description=https://octopart.com:443/opatz8j6/c1?t=uBn0TeqP8mKnL0vu0TJMmksDArhA2xnjYHGUamFnwr0Lj9eHIe45ESEN0N09SN0W_BFgT4nWPUjYGWobgYUvNDrBCDNj55iUPKXM9JYlIPnVrBwaj6wnkAkpfDxE12ONBvxAFGcpA2XbXe3Nb2f-XI-nfFiswF2m2FowNrpNRvB6AKeZWoD9ll47nWlvgbebJo7YeJhCYeCrDHTRzSO7UGKpEOZsMMrM7qA5P6RiotoGMUrQrPOY8nKuTkPUKGEWd7UCPS9eXcAoSRVseLv4YBSMU9ZNnucNIvXCnlBboY69LxYHHH7v03oG_pEBnIu6Uvski6XAlJ3wmAIBVDV8r6g4l_d5L4-3&src-supplier=Compliance+Statements, ComponentLink33URL=https://octopart.com:443/opatz8j6/c1?t=uBn0TeqP8mKnL0vu0TJMmksDArhA2xnjYHGUamFnwr0Lj9eHIe45ESEN0N09SN0W_BFgT4nWPUjYGWobgYUvNDrBCDNj55iUPKXM9JYlIPnVrBwaj6wnkAkpfDxE12ONBvxAFGcpA2XbXe3Nb2f-XI-nfFiswF2m2FowNrpNRvB6AKeZWoD9ll47nWlvgbebJo7YeJhCYeCrDHTRzSO7UGKpEOZsMMrM7qA5P6RiotoGMUrQrPOY8nKuTkPUKGEWd7UCPS9eXcAoSRVseLv4YBSMU9ZNnucNIvXCnlBboY69LxYHHH7v03oG_pEBnIu6Uvski6XAlJ3wmAIBVDV8r6g4l_d5L4-3&src-supplier=Compliance+Statements, Contact Plating=Tin, Current Rating=6A, Element Configuration=Single, Export Control Classification Number (ECCN) Code=EAR99, Forward Current=6A, Harmonized Tariff Schedule (HTS) Code=8541.10.00.80, Height=20.83mm, Introduction Date=1999-01-01, Lead Free="Lead Free", Length=22.3mm, Lifecycle Status=Production, Manufacturer Part Number=GBU6J, Max Operating Temperature=150°C, Max Output current=6A, Max Surge Current=175A, Min Breakdown Voltage=600V, Mounting Technology="Through Hole", Number of Elements=4, Number of Terminals=4, Output Current=6A, Peak Non-Repetitive Surge Current=175A, Peak Reverse Current=5µA, Pins=4, Power Dissipation=12W, Pricing="1=2.02, 20=1.136, 100=0.8699, 500=0.6911, 1000=0.63359, 2000=0.58524, 5000=0.53293, 10000=0.53113 (USD)", Radiation Hardening=No, REACH SVHC=No, Reverse Standoff Voltage=600V, Reverse Voltage=600V, RoHS=Compliant, Schedule B="8541100080, 8541100080|8541100080|8541100080|8541100080|8541100080", Stock=3548, Supplier=DigiKey, Voltage Rating (DC)=600V, Weight=5.4g, Width=3.56mm
C100 C101: library part 861011483006, "WCAP-AIG8 Aluminum Electrolytic Capacitor, Snap-In, D22 x H50mm, 150µF, 450V", Capacitance=150µF, Capacitance Tolerance=+/-20%, Case/Size Code="D22 x H50mm", Leakage Current=1350µA, Manufacturer="Wurth Elektronik", Operating Temperature Max=85°C, Operating Temperature Min=-25°C, Rated Voltage (DC)=450V, Ripple Current=1.69A, Category="Aluminum Electrolytic Capacitors", ComponentLink1Description="Website Link", ComponentLink1URL=https://www.we-online.com/redexpert/article/861011483006?ad, ComponentLink2Description="Datasheet Link", ComponentLink2URL=https://www.we-online.com/redexpert/spec/861011483006?ad, Diameter=22mm, Dissipation Factor=20%, Endurance=2000h, Height=50mm, Manufacturer Part Number=861011483006, Match Code=WCAP-AIG8, Mount="Through Hole", Packaging=Tray, Technical Reference=ANAN510151M450DSIC3B000
C102 C107 C119: library part VY2222M35Y5US63V7, "CAP CER 2200PF 440VAC Y5U RADIAL", Case/Package=Radial, Dielectric=Y5U, Dielectric Material=Ceramic, Manufacturer=Vishay, Max Operating Temperature=125°C, Min Operating Temperature=-40°C, Supplier Part Number=BC2356-ND, Tolerance=20%, Voltage=250V, Voltage Rating=1kV, Voltage Rating (AC)=300V, Category="Ceramic Capacitors", ComponentLink1Description=https://datasheet.octopart.com:443/VY2222M35Y5US63V7-Vishay-datasheet-182139072.pdf?src-supplier=IHS, ComponentLink1URL=https://datasheet.octopart.com:443/VY2222M35Y5US63V7-Vishay-datasheet-182139072.pdf?src-supplier=IHS, ComponentLink2Description=https://datasheet.octopart.com:443/VY2222M35Y5US63V7-Vishay-datasheet-182137621.pdf?src-supplier=IHS, ComponentLink2URL=https://datasheet.octopart.com:443/VY2222M35Y5US63V7-Vishay-datasheet-182137621.pdf?src-supplier=IHS, ComponentLink3Description=https://datasheet.octopart.com:443/VY2222M35Y5US63V7-Vishay-BCcomponents-datasheet-138899136.pdf?src-supplier=Upverter, ComponentLink3URL=https://datasheet.octopart.com:443/VY2222M35Y5US63V7-Vishay-BCcomponents-datasheet-138899136.pdf?src-supplier=Upverter, ComponentLink4Description=https://datasheet.octopart.com:443/VY2222M35Y5US63V7-Vishay-datasheet-62321353.pdf?src-supplier=Farnell, ComponentLink4URL=https://datasheet.octopart.com:443/VY2222M35Y5US63V7-Vishay-datasheet-62321353.pdf?src-supplier=Farnell, ComponentLink5Description=https://datasheet.octopart.com:443/VY2222M35Y5US63V7-Vishay-datasheet-15070738.pdf?src-supplier=Farnell, ComponentLink5URL=https://datasheet.octopart.com:443/VY2222M35Y5US63V7-Vishay-datasheet-15070738.pdf?src-supplier=Farnell, ComponentLink6Description=https://datasheet.octopart.com:443/VY2222M35Y5US63V7-Vishay-datasheet-10380040.pdf?src-supplier=element14+APAC, ComponentLink6URL=https://datasheet.octopart.com:443/VY2222M35Y5US63V7-Vishay-datasheet-10380040.pdf?src-supplier=element14+APAC, ComponentLink7Description=https://datasheet.octopart.com:443/VY2222M35Y5US63V7-Vishay-datasheet-13530909.pdf?src-supplier=Future+Electronics, ComponentLink7URL=https://datasheet.octopart.com:443/VY2222M35Y5US63V7-Vishay-datasheet-13530909.pdf?src-supplier=Future+Electronics, ComponentLink8Description=https://datasheet.octopart.com:443/VY2222M35Y5US63V7-Vishay-datasheet-13402494.pdf?src-supplier=Future+Electronics, ComponentLink8URL=https://datasheet.octopart.com:443/VY2222M35Y5US63V7-Vishay-datasheet-13402494.pdf?src-supplier=Future+Electronics, ComponentLink9Description=https://datasheet.octopart.com:443/VY2222M35Y5US63V7-Vishay-datasheet-13168647.pdf?src-supplier=Future+Electronics, ComponentLink9URL=https://datasheet.octopart.com:443/VY2222M35Y5US63V7-Vishay-datasheet-13168647.pdf?src-supplier=Future+Electronics, ComponentLink10Description=https://datasheet.octopart.com:443/VY2222M35Y5US63V7-Vishay-datasheet-13030022.pdf?src-supplier=Future+Electronics, ComponentLink10URL=https://datasheet.octopart.com:443/VY2222M35Y5US63V7-Vishay-datasheet-13030022.pdf?src-supplier=Future+Electronics, ComponentLink11Description=https://datasheet.octopart.com:443/VY2222M35Y5US63V7-Vishay-datasheet-12553972.pdf?src-supplier=Future+Electronics, ComponentLink11URL=https://datasheet.octopart.com:443/VY2222M35Y5US63V7-Vishay-datasheet-12553972.pdf?src-supplier=Future+Electronics, ComponentLink12Description=https://datasheet.octopart.com:443/VY2222M35Y5US63V7-Vishay-datasheet-12524127.pdf?src-supplier=Future+Electronics, ComponentLink12URL=https://datasheet.octopart.com:443/VY2222M35Y5US63V7-Vishay-datasheet-12524127.pdf?src-supplier=Future+Electronics, ComponentLink13Description=https://datasheet.octopart.com:443/VY2222M35Y5US63V7-Vishay-datasheet-12510687.pdf?src-supplier=Future+Electronics, ComponentLink13URL=https://datasheet.octopart.com:443/VY2222M35Y5US63V7-Vishay-datasheet-12510687.pdf?src-supplier=Future+Electronics, ComponentLink14Description=https://datasheet.octopart.com:443/VY2222M35Y5US63V7-Vishay-datasheet-27584505.pdf?src-supplier=Future+Electronics, ComponentLink14URL=https://datasheet.octopart.com:443/VY2222M35Y5US63V7-Vishay-datasheet-27584505.pdf?src-supplier=Future+Electronics, ComponentLink15Description=https://datasheet.octopart.com:443/VY2222M35Y5US63V7-Vishay-datasheet-9918016.pdf?src-supplier=RS+(Formerly+Allied+Electronics), ComponentLink15URL=https://datasheet.octopart.com:443/VY2222M35Y5US63V7-Vishay-datasheet-9918016.pdf?src-supplier=RS+(Formerly+Allied+Electronics), ComponentLink16Description=http://sigma.octopart.com:80/rohs_statement/Vishay-company-15.pdf?src-supplier=Compliance+Statements, ComponentLink16URL=http://sigma.octopart.com:80/rohs_statement/Vishay-company-15.pdf?src-supplier=Compliance+Statements, Composition=Ceramic, Contact Plating=Tin, Depth=5mm, Diameter=9mm, Export Control Classification Number (ECCN) Code=EAR99, Harmonized Tariff Schedule (HTS) Code=8532.23.00.60, Height=9mm, Height - Seated (Max)=13.0048mm, Lead Diameter=600µm, Lead Free="Lead Free", Lead Length=30mm, Lead Pitch=7.5mm, Lead/Base Style=Kinked, Length=9mm, Lifecycle Status=Production, Manufacturer Part Number=VY2222M35Y5US63V7, Material=Ceramic, Mounting Technology="PCB, Through Hole", Number of Terminals=2, Packaging=Bulk, Pricing="1=0.48, 10=0.288, 50=0.2152, 100=0.1928, 500=0.15486, 1000=0.14314, 3000=0.12868, 5000=0.12334 (USD)", Radiation Hardening=No, REACH SVHC=Yes, RoHS=Compliant, Schedule B="8532230060, 8532230060|8532230060, 8532230060|8532230060|8532230060, 8532230060|8532230060|8532230060|8532230060", Stock=12709, Supplier=DigiKey, Terminal Pitch=7.5mm, Termination=Radial, Voltage Rating (DC)=1kV, Width=5mm
C103 C104: library part 890334025039CS, "WCAP-FTXX Film Capacitor, THT, 18mm x 8mm x 14mm, 470nF, 310V", Capacitance=470nF, Insulation Resistance=21.28GΩ, Manufacturer="Wurth Elektronik", Max Operating Temperature=105°C, Min Operating Temperature=-40°C, Rate of Voltage Rise=220V/µs, Rated Voltage (AC)=310V, Application="Across the mains", Category="Film Capacitors", ComponentLink1Description="Website Link", ComponentLink1URL=https://www.we-online.com/redexpert/article/890334025039CS?ad, ComponentLink2Description="Datasheet Link", ComponentLink2URL=https://www.we-online.com/redexpert/spec/890334025039CS?ad, Dissipation Factor @1kHz=0.1%, Height=14mm, Lead Pitch=15mm, Length=18mm, Manufacturer Part Number=890334025039CS, Match Code=WCAP-FTXX, Mount="Through Hole", Packaging=Bulk, Safety Class=X2, Width=8mm
C105: library part 890414025003CS, "WCAP-FTXH THB X2-Capacitor, THT, L18 x W8.5 x H14.5mm, 220nF, 310V", Capacitance=220nF, Insulation Resistance=25GΩ, Manufacturer="Wurth Elektronik", Operating Temperature Max=110°C, Operating Temperature Min=-40°C, Rate of Voltage Rise=400V/μs, Rated Voltage (AC)=310V, Application="Across the mains or in series with the mains", Category="Film Capacitors", ComponentLink1Description="Website Link", ComponentLink1URL=https://www.we-online.com/redexpert/article/890414025003CS?ad, ComponentLink2Description="Datasheet Link", ComponentLink2URL=https://www.we-online.com/redexpert/spec/890414025003CS?ad, Dissipation Factor @1kHz=0.1%, Height=14.5mm, Length=18mm, Manufacturer Part Number=890414025003CS, Match Code=WCAP-FTXH, Mount="Through Hole", Packaging=Carton, Pitch=15mm, Safety Class=X2, Width=8.5mm
C106: library part 890414026009CS, "WCAP-FTXH THB X2-Capacitor, THT, L26.5 x W14.5 x H24.5mm, 1.5µF, 310V", Capacitance=1.5µF, Insulation Resistance=5GΩ, Manufacturer="Wurth Elektronik", Operating Temperature Max=110°C, Operating Temperature Min=-40°C, Rate of Voltage Rise=200V/μs, Rated Voltage (AC)=310V, Application="Across the mains", Category="Film Capacitors", ComponentLink1Description="Website Link", ComponentLink1URL=https://www.we-online.com/redexpert/article/890414026009CS?ad, ComponentLink2Description="Datasheet Link", ComponentLink2URL=https://www.we-online.com/redexpert/spec/890414026009CS?ad, Dissipation Factor @1kHz=0.3%, Height=24.5mm, Length=26.5mm, Manufacturer Part Number=890414026009CS, Match Code=WCAP-FTXH, Mount="Through Hole", Packaging=Carton, Pitch=22.5mm, Safety Class=X2, Width=14.5mm
C108: library part 885012206053, "WCAP-CSGP Multilayer Ceramic Chip Capacitor, General Purpose, size 0603, 100pF, 25V", Capacitance=100pF, Capacitance Tolerance=+/-10%, Case/Size Code=0603, Insulation Resistance=10GΩ, Manufacturer="Wurth Elektronik", Max Operating Temperature=125°C, Min Operating Temperature=-55°C, Rated Voltage (DC)=25V, Category="Multilayer Ceramic Chip Capacitors", Ceramic Type=X7R, ComponentLink1Description="Website Link", ComponentLink1URL=https://www.we-online.com/redexpert/article/885012206053?ad, ComponentLink2Description="Datasheet Link", ComponentLink2URL=https://www.we-online.com/redexpert/spec/885012206053?ad, Dissipation Factor=3.5%, Height=0.8mm, Length=1.6mm, Manufacturer Part Number=885012206053, Match Code=WCAP-CSGP, Mount="Surface Mount", Packaging="Tape and Reel", Technical Reference=X7R0603101K025DFCT10000, Width=0.8mm
C109: library part 885012206126, "WCAP-CSGP Multilayer Ceramic Chip Capacitor, General Purpose, size 0603, 1μF, 50V", Capacitance=1μF, Capacitance Tolerance=+/-10%, Case/Size Code=0603, Insulation Resistance=0.5GΩ, Manufacturer="Wurth Elektronik", Max Operating Temperature=125°C, Min Operating Temperature=-55°C, Rated Voltage (DC)=50V, Category="Multilayer Ceramic Chip Capacitors", Ceramic Type=X7R, ComponentLink1Description="Website Link", ComponentLink1URL=https://www.we-online.com/redexpert/article/885012206126?ad, ComponentLink2Description="Datasheet Link", ComponentLink2URL=https://www.we-online.com/redexpert/spec/885012206126?ad, Dissipation Factor=10%, Height=0.8mm, Length=1.6mm, Manufacturer Part Number=885012206126, Match Code=WCAP-CSGP, Mount="Surface Mount", Packaging="Tape and Reel", Technical Reference=X7R0603105K050DFCT10000, Width=0.8mm
C110: library part 885012206095R, "WCAP-CSGP Multilayer Ceramic Chip Capacitor, General Purpose, size 0603, 100nF, 50V", Capacitance=100nF, Capacitance Tolerance=+/-10%, Case/Size Code=0603, Insulation Resistance=5GΩ, Manufacturer="Wurth Elektronik", Max Operating Temperature=125°C, Min Operating Temperature=-55°C, Rated Voltage (DC)=50V, Category="Multilayer Ceramic Chip Capacitors", Ceramic Type=X7R, ComponentLink1Description="Website Link", ComponentLink1URL=https://www.we-online.com/redexpert/article/885012206095R?ad, ComponentLink2Description="Datasheet Link", ComponentLink2URL=https://www.we-online.com/redexpert/spec/885012206095R?ad, Dissipation Factor=3%, Height=0.8mm, Length=1.6mm, Manufacturer Part Number=885012206095R, Match Code=WCAP-CSGP, Mount="Surface Mount", Packaging="Tape and Reel", Technical Reference=X7R0603104K050DFCT20000, Width=0.8mm
C111: library part 885012206062, "WCAP-CSGP Multilayer Ceramic Chip Capacitor, General Purpose, size 0603, 3.3nF, 25V", Capacitance=3.3nF, Capacitance Tolerance=+/-10%, Case/Size Code=0603, Insulation Resistance=10GΩ, Manufacturer="Wurth Elektronik", Max Operating Temperature=125°C, Min Operating Temperature=-55°C, Rated Voltage (DC)=25V, Category="Multilayer Ceramic Chip Capacitors", Ceramic Type=X7R, ComponentLink1Description="Website Link", ComponentLink1URL=https://www.we-online.com/redexpert/article/885012206062?ad, ComponentLink2Description="Datasheet Link", ComponentLink2URL=https://www.we-online.com/redexpert/spec/885012206062?ad, Dissipation Factor=3.5%, Height=0.8mm, Length=1.6mm, Manufacturer Part Number=885012206062, Match Code=WCAP-CSGP, Mount="Surface Mount", Packaging="Tape and Reel", Technical Reference=X7R0603332K025DFCT10000, Width=0.8mm
C112: library part 885012006039, "WCAP-CSGP Multilayer Ceramic Chip Capacitor, General Purpose, size 0603, 150pF, 25V", Capacitance=150pF, Capacitance Tolerance=+/-5%, Case/Size Code=0603, Insulation Resistance=10GΩ, Manufacturer="Wurth Elektronik", Operating Temperature Max=125°C, Operating Temperature Min=-55°C, Rated Voltage (DC)=25V, Category="Multilayer Ceramic Chip Capacitors", Ceramic Type=NP0, ComponentLink1Description="Website Link", ComponentLink1URL=https://www.we-online.com/redexpert/article/885012006039?ad, ComponentLink2Description="Datasheet Link", ComponentLink2URL=https://www.we-online.com/redexpert/spec/885012006039?ad, Height=0.8mm, Length=1.6mm, Manufacturer Part Number=885012006039, Match Code=WCAP-CSGP, Mount="Surface Mount", Packaging="Tape and Reel", Q Factor=1000, Technical Reference=NP00603151J025DFCT10000, Width=0.8mm
C113: library part 885012106020, "WCAP-CSGP Multilayer Ceramic Chip Capacitor, General Purpose, size 0603, 470nF, 25V", Capacitance=470nF, Capacitance Tolerance=+/-20%, Case/Size Code=0603, Insulation Resistance=1.1GΩ, Manufacturer="Wurth Elektronik", Max Operating Temperature=85°C, Min Operating Temperature=-55°C, Rated Voltage (DC)=25V, Category="Multilayer Ceramic Chip Capacitors", Ceramic Type=X5R, ComponentLink1Description="Website Link", ComponentLink1URL=https://www.we-online.com/redexpert/article/885012106020?ad, ComponentLink2Description="Datasheet Link", ComponentLink2URL=https://www.we-online.com/redexpert/spec/885012106020?ad, Dissipation Factor=10%, Height=0.8mm, Length=1.6mm, Manufacturer Part Number=885012106020, Match Code=WCAP-CSGP, Mount="Surface Mount", Packaging="Tape and Reel", Technical Reference=X5R0603474M025DFCT10000, Width=0.8mm
C114: library part 885012206061, "WCAP-CSGP Multilayer Ceramic Chip Capacitor, General Purpose, size 0603, 2.2nF, 25V", Capacitance=2.2nF, Capacitance Tolerance=+/-10%, Case/Size Code=0603, Insulation Resistance=10GΩ, Manufacturer="Wurth Elektronik", Operating Temperature Max=125°C, Operating Temperature Min=-55°C, Rated Voltage (DC)=25V, Category="Multilayer Ceramic Chip Capacitors", Ceramic Type=X7R, ComponentLink1Description="Website Link", ComponentLink1URL=https://www.we-online.com/redexpert/article/885012206061?ad, ComponentLink2Description="Datasheet Link", ComponentLink2URL=https://www.we-online.com/redexpert/spec/885012206061?ad, Dissipation Factor=3.5%, Height=0.8mm, Length=1.6mm, Manufacturer Part Number=885012206061, Match Code=WCAP-CSGP, Mount="Surface Mount", Packaging="Tape and Reel", Technical Reference=X7R0603222K025DFCT10000, Width=0.8mm
C115: library part 885012006032, "WCAP-CSGP Multilayer Ceramic Chip Capacitor, General Purpose, size 0603, 10pF, 25V", Capacitance=10pF, Capacitance Tolerance=+/-5%, Case/Size Code=0603, Insulation Resistance=10GΩ, Manufacturer="Wurth Elektronik", Max Operating Temperature=125°C, Min Operating Temperature=-55°C, Rated Voltage (DC)=25V, Category="Multilayer Ceramic Chip Capacitors", Ceramic Type=NP0, ComponentLink1Description="Website Link", ComponentLink1URL=https://www.we-online.com/redexpert/article/885012006032?ad, ComponentLink2Description="Datasheet Link", ComponentLink2URL=https://www.we-online.com/redexpert/spec/885012006032?ad, Height=0.8mm, Length=1.6mm, Manufacturer Part Number=885012006032, Match Code=WCAP-CSGP, Mount="Surface Mount", Packaging="Tape and Reel", Q Factor=600, Technical Reference=NP00603100J025DFCT10000, Width=0.8mm
C116: library part 860040374004, "WCAP-ATUL Aluminum Electrolytic Capacitor, Radial, THT, 8mm x 11.5mm, 220µF, 16V", Capacitance=220µF, Capacitance Tolerance=20%, Leakage Current=35.2µA, Manufacturer="Wurth Elektronik", Operating Temperature Max=105°C, Operating Temperature Min=-40°C, Rated Voltage (DC)=16V, Ripple Current=480mA, Category="Aluminum Electrolytic Capacitors", ComponentLink1Description="Website Link", ComponentLink1URL=https://www.we-online.com/redexpert/article/860040374004?ad, ComponentLink2Description="Datasheet Link", ComponentLink2URL=https://www.we-online.com/redexpert/spec/860040374004?ad, Diameter=8mm, Dissipation Factor=16%, Endurance=7000h, Height=11.5mm, Manufacturer Part Number=860040374004, Match Code=WCAP-ATUL, Mount="Through Hole", Packaging="Ammo Pack"
C117: library part 885342008007, "WCAP-CSMH Multilayer Ceramic Chip Capacitor Mid and High Voltage, SMT, size 1206, NP0 Class I, 2.2nF, 630V", Capacitance=2.2nF, Capacitance Tolerance=+/-5%, Case/Size Code=1206, Insulation Resistance=10GΩ, Manufacturer="Wurth Elektronik", Operating Temperature Max=125°C, Operating Temperature Min=-55°C, Rated Voltage (DC)=630V, Category="Multilayer Ceramic Chip Capacitors", Ceramic Type="NP0 Class I", ComponentLink1Description="Website Link", ComponentLink1URL=https://www.we-online.com/redexpert/article/885342008007?ad, ComponentLink2Description="Datasheet Link", ComponentLink2URL=https://www.we-online.com/redexpert/spec/885342008007?ad, Height=1.6mm, Length=3.2mm, Manufacturer Part Number=885342008007, Match Code=WCAP-CSMH, Mount="Surface Mount", Packaging="Tape and Reel", Q Factor Min=1000, Width=1.6mm
C118: library part 860080474008, "WCAP-ATLI Aluminum Electrolytic Capacitor, Radial, THT, D8 x H11.5mm, 150µF, 25V", Capacitance=150uF, Capacitance Tolerance=+/-20%, Leakage Current=37.5uA, Manufacturer="Wurth Elektronik", Operating Temperature Max=105°C, Operating Temperature Min=-55°C, Rated Voltage (DC)=25V, Ripple Current=540mA, Category="Aluminum Electrolytic Capacitors", ComponentLink1Description="Website Link", ComponentLink1URL=https://www.we-online.com/redexpert/article/860080474008?ad, ComponentLink2Description="Datasheet Link", ComponentLink2URL=https://www.we-online.com/redexpert/spec/860080474008?ad, Diameter=8mm, Dissipation Factor=10%, Endurance=3000h, Height=11.5mm, Manufacturer Part Number=860080474008, Match Code=WCAP-ATLI, Mount="Through Hole", Packaging="Ammo Pack", Technical Reference=ATEE115151M025DSPA7C000
C120: library part 885012107018, "WCAP-CSGP Multilayer Ceramic Chip Capacitor, General Purpose, size 0805, 4.7μF, 25V", Capacitance=4.7μF, Capacitance Tolerance=+/-20%, Case/Size Code=0805, Insulation Resistance=0.02GΩ, Manufacturer="Wurth Elektronik", Operating Temperature Max=85°C, Operating Temperature Min=-55°C, Rated Voltage (DC)=25V, Category="Multilayer Ceramic Chip Capacitors", Ceramic Type=X5R, ComponentLink1Description="Website Link", ComponentLink1URL=https://www.we-online.com/redexpert/article/885012107018?ad, ComponentLink2Description="Datasheet Link", ComponentLink2URL=https://www.we-online.com/redexpert/spec/885012107018?ad, Dissipation Factor=10%, Height=1.25mm, Length=2mm, Manufacturer Part Number=885012107018, Match Code=WCAP-CSGP, Mount="Surface Mount", Packaging="Tape and Reel", Technical Reference=X5R0805475M025DFCT10000, Width=1.25mm
C121: library part 885012006042, "WCAP-CSGP Multilayer Ceramic Chip Capacitor, General Purpose, size 0603, 470pF, 25V", Capacitance=470pF, Capacitance Tolerance=+/-5%, Case/Size Code=0603, Insulation Resistance=10GΩ, Manufacturer="Wurth Elektronik", Operating Temperature Max=125°C, Operating Temperature Min=-55°C, Rated Voltage (DC)=25V, Category="Multilayer Ceramic Chip Capacitors", Ceramic Type=NP0, ComponentLink1Description="Website Link", ComponentLink1URL=https://www.we-online.com/redexpert/article/885012006042?ad, ComponentLink2Description="Datasheet Link", ComponentLink2URL=https://www.we-online.com/redexpert/spec/885012006042?ad, Height=0.8mm, Length=1.6mm, Manufacturer Part Number=885012006042, Match Code=WCAP-CSGP, Mount="Surface Mount", Packaging="Tape and Reel", Q Factor=1000, Technical Reference=NP00603471J025DFCT10000, Width=0.8mm
C122: library part 885012206068, "WCAP-CSGP Multilayer Ceramic Chip Capacitor, General Purpose, size 0603, 33nF, 25V", Capacitance=33nF, Capacitance Tolerance=+/-10%, Case/Size Code=0603, Insulation Resistance=10GΩ, Manufacturer="Wurth Elektronik", Operating Temperature Max=125°C, Operating Temperature Min=-55°C, Rated Voltage (DC)=25V, Category="Multilayer Ceramic Chip Capacitors", Ceramic Type=X7R, ComponentLink1Description="Website Link", ComponentLink1URL=https://www.we-online.com/redexpert/article/885012206068?ad, ComponentLink2Description="Datasheet Link", ComponentLink2URL=https://www.we-online.com/redexpert/spec/885012206068?ad, Dissipation Factor=3.5%, Height=0.8mm, Length=1.6mm, Manufacturer Part Number=885012206068, Match Code=WCAP-CSGP, Mount="Surface Mount", Packaging="Tape and Reel", Technical Reference=X7R0603333K025DFCT10000, Width=0.8mm
D100: "DIODE STANDARD 600V 2A SMA", Average Rectified Current=2A, Case/Package=SMA, Forward Voltage=1.05V, Manufacturer=STMicroelectronics, Max Forward Surge Current (Ifsm)=35A, Max Junction Temperature (Tj)=175°C, Max Repetitive Reverse Voltage (Vrrm)=600V, Min Operating Temperature=-65°C, Peak Reverse Current=2µA, Supplier Part Number=497-3549-6-ND, Category="Rectifier Diodes", China RoHS=Non-Compliant, ComponentLink1Description=https://datasheet.octopart.com:443/STTH2L06A-STMicroelectronics-datasheet-12540759.pdf?src-supplier=Newark, ComponentLink1URL=https://datasheet.octopart.com:443/STTH2L06A-STMicroelectronics-datasheet-12540759.pdf?src-supplier=Newark, ComponentLink2Description=https://datasheet.octopart.com:443/STTH2L06A-STMicroelectronics-datasheet-10836161.pdf?src-supplier=Factory+Futures, ComponentLink2URL=https://datasheet.octopart.com:443/STTH2L06A-STMicroelectronics-datasheet-10836161.pdf?src-supplier=Factory+Futures, ComponentLink3Description=https://datasheet.octopart.com:443/STTH2L06A-STMicroelectronics-datasheet-8103793.pdf?src-supplier=Factory+Futures, ComponentLink3URL=https://datasheet.octopart.com:443/STTH2L06A-STMicroelectronics-datasheet-8103793.pdf?src-supplier=Factory+Futures, ComponentLink4Description=https://datasheet.octopart.com:443/STTH2L06A-STMicroelectronics-datasheet-14054138.pdf?src-supplier=iiiC, ComponentLink4URL=https://datasheet.octopart.com:443/STTH2L06A-STMicroelectronics-datasheet-14054138.pdf?src-supplier=iiiC, ComponentLink5Description=https://datasheet.octopart.com:443/STTH2L06A-STMicroelectronics-datasheet-66230.pdf?src-supplier=DigiKey, ComponentLink5URL=https://datasheet.octopart.com:443/STTH2L06A-STMicroelectronics-datasheet-66230.pdf?src-supplier=DigiKey, Country of Origin="Mainland China", Current Rating=2A, Element Configuration=Single, Export Control Classification Number (ECCN) Code=EAR99, Forward Current=2A, Harmonized Tariff Schedule (HTS) Code=8541.10.00.80, Height=2.03mm, Introduction Date=2004-09-07, Length=4.6mm, Lifecycle Status=Production, Manufacturer Part Number=STTH2L06A, Max Operating Temperature=175°C, Max Output current=2A, Max Reverse Voltage (DC)=600V, Max Surge Current=35A, Mounting Technology="Surface Mount", Number of Elements=1, Number of Terminals=2, Output Current=2A, Packaging="Tape and Reel", Peak Non-Repetitive Surge Current=35A, Pins=2, Polarity=Standard, Pricing="1=0.56, 10=0.346, 100=0.2202, 500=0.16544, 1000=0.14776, 2000=0.13287 (USD)", Radiation Hardening=No, REACH SVHC=No, Recovery Time=85ns, Reverse Recovery Time=85ns, Reverse Standoff Voltage=600V, Reverse Voltage=600V, RoHS=Compliant, Schedule B="8541100080, 8541100080|8541100080|8541100080|8541100080|8541100080", Stock=9756, Supplier=DigiKey, Voltage Rating (DC)=600V, Width=2.95mm